# Altium PCB PCB_20140728.PcbDoc (part 1 of 4)
Units mil, origin at the board's own origin, x right, y up, seen from the top; angles counter-clockwise.
Board outline 7874.02 x 7086.61 mil, 2 copper layers (Top Layer, Bottom Layer); 393 components, 284 nets, 1417 pads, 403 vias.
Unrouted connection lines stored in the file: 1.
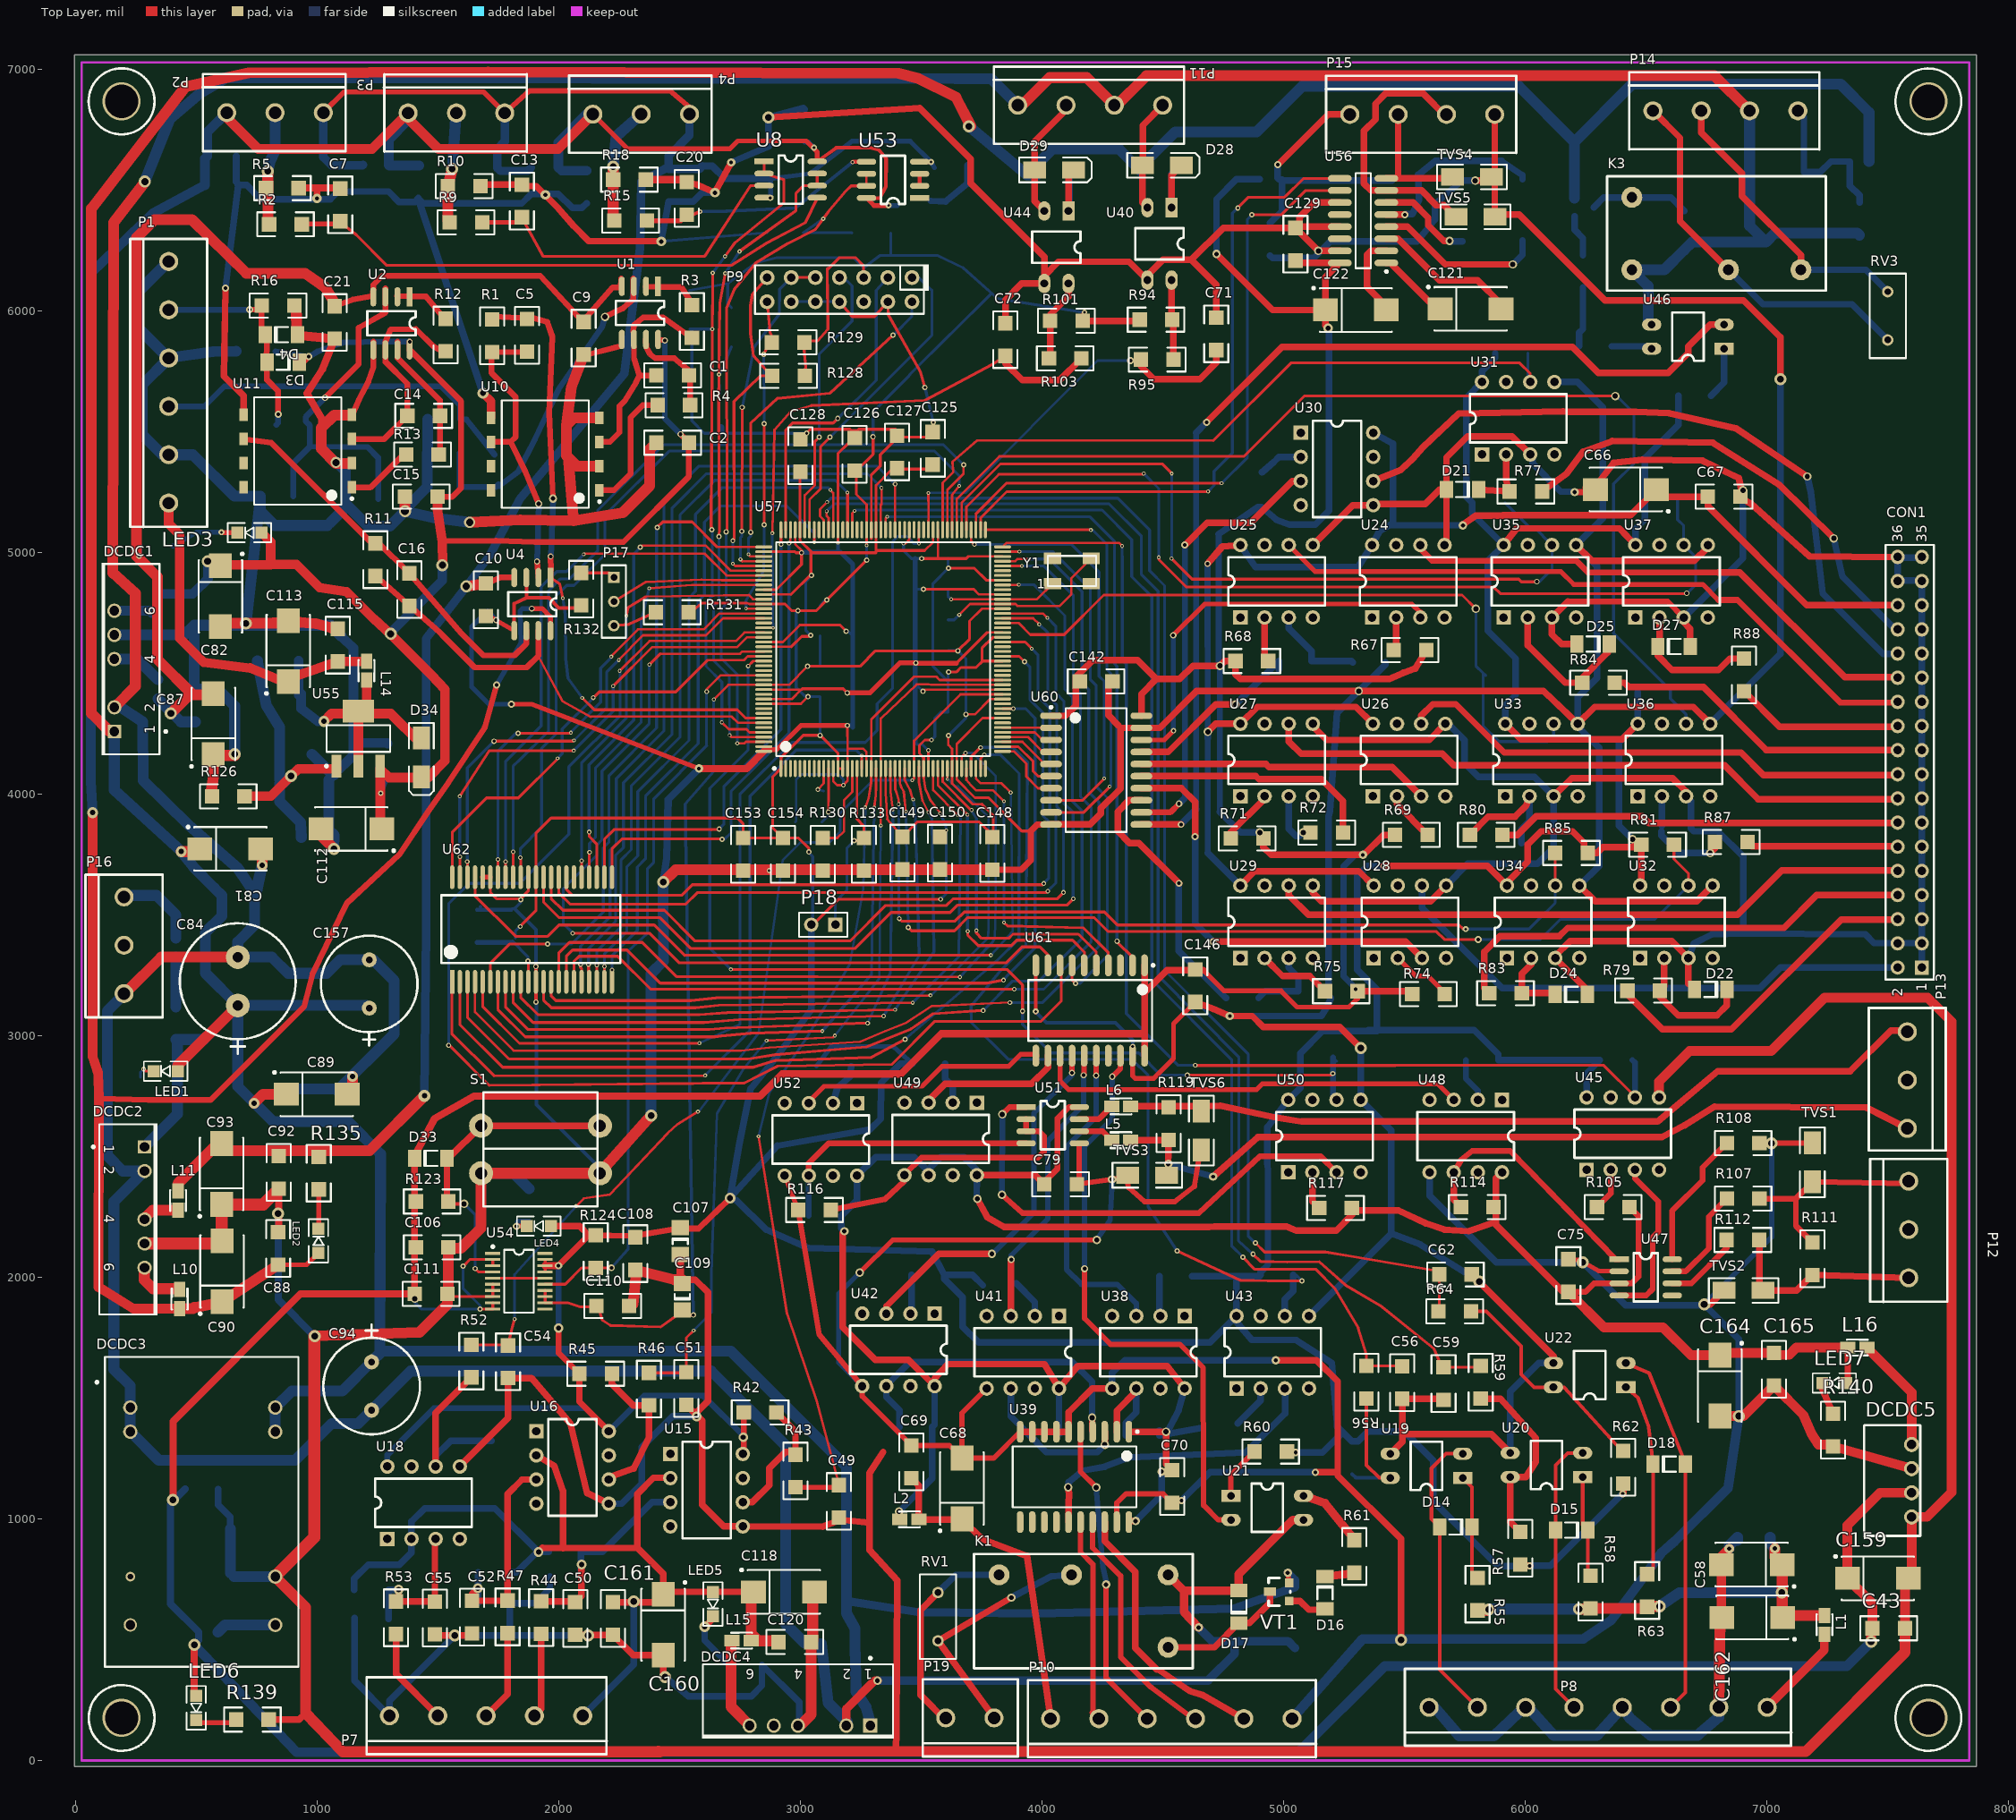
[diagram p0: Top Layer view]
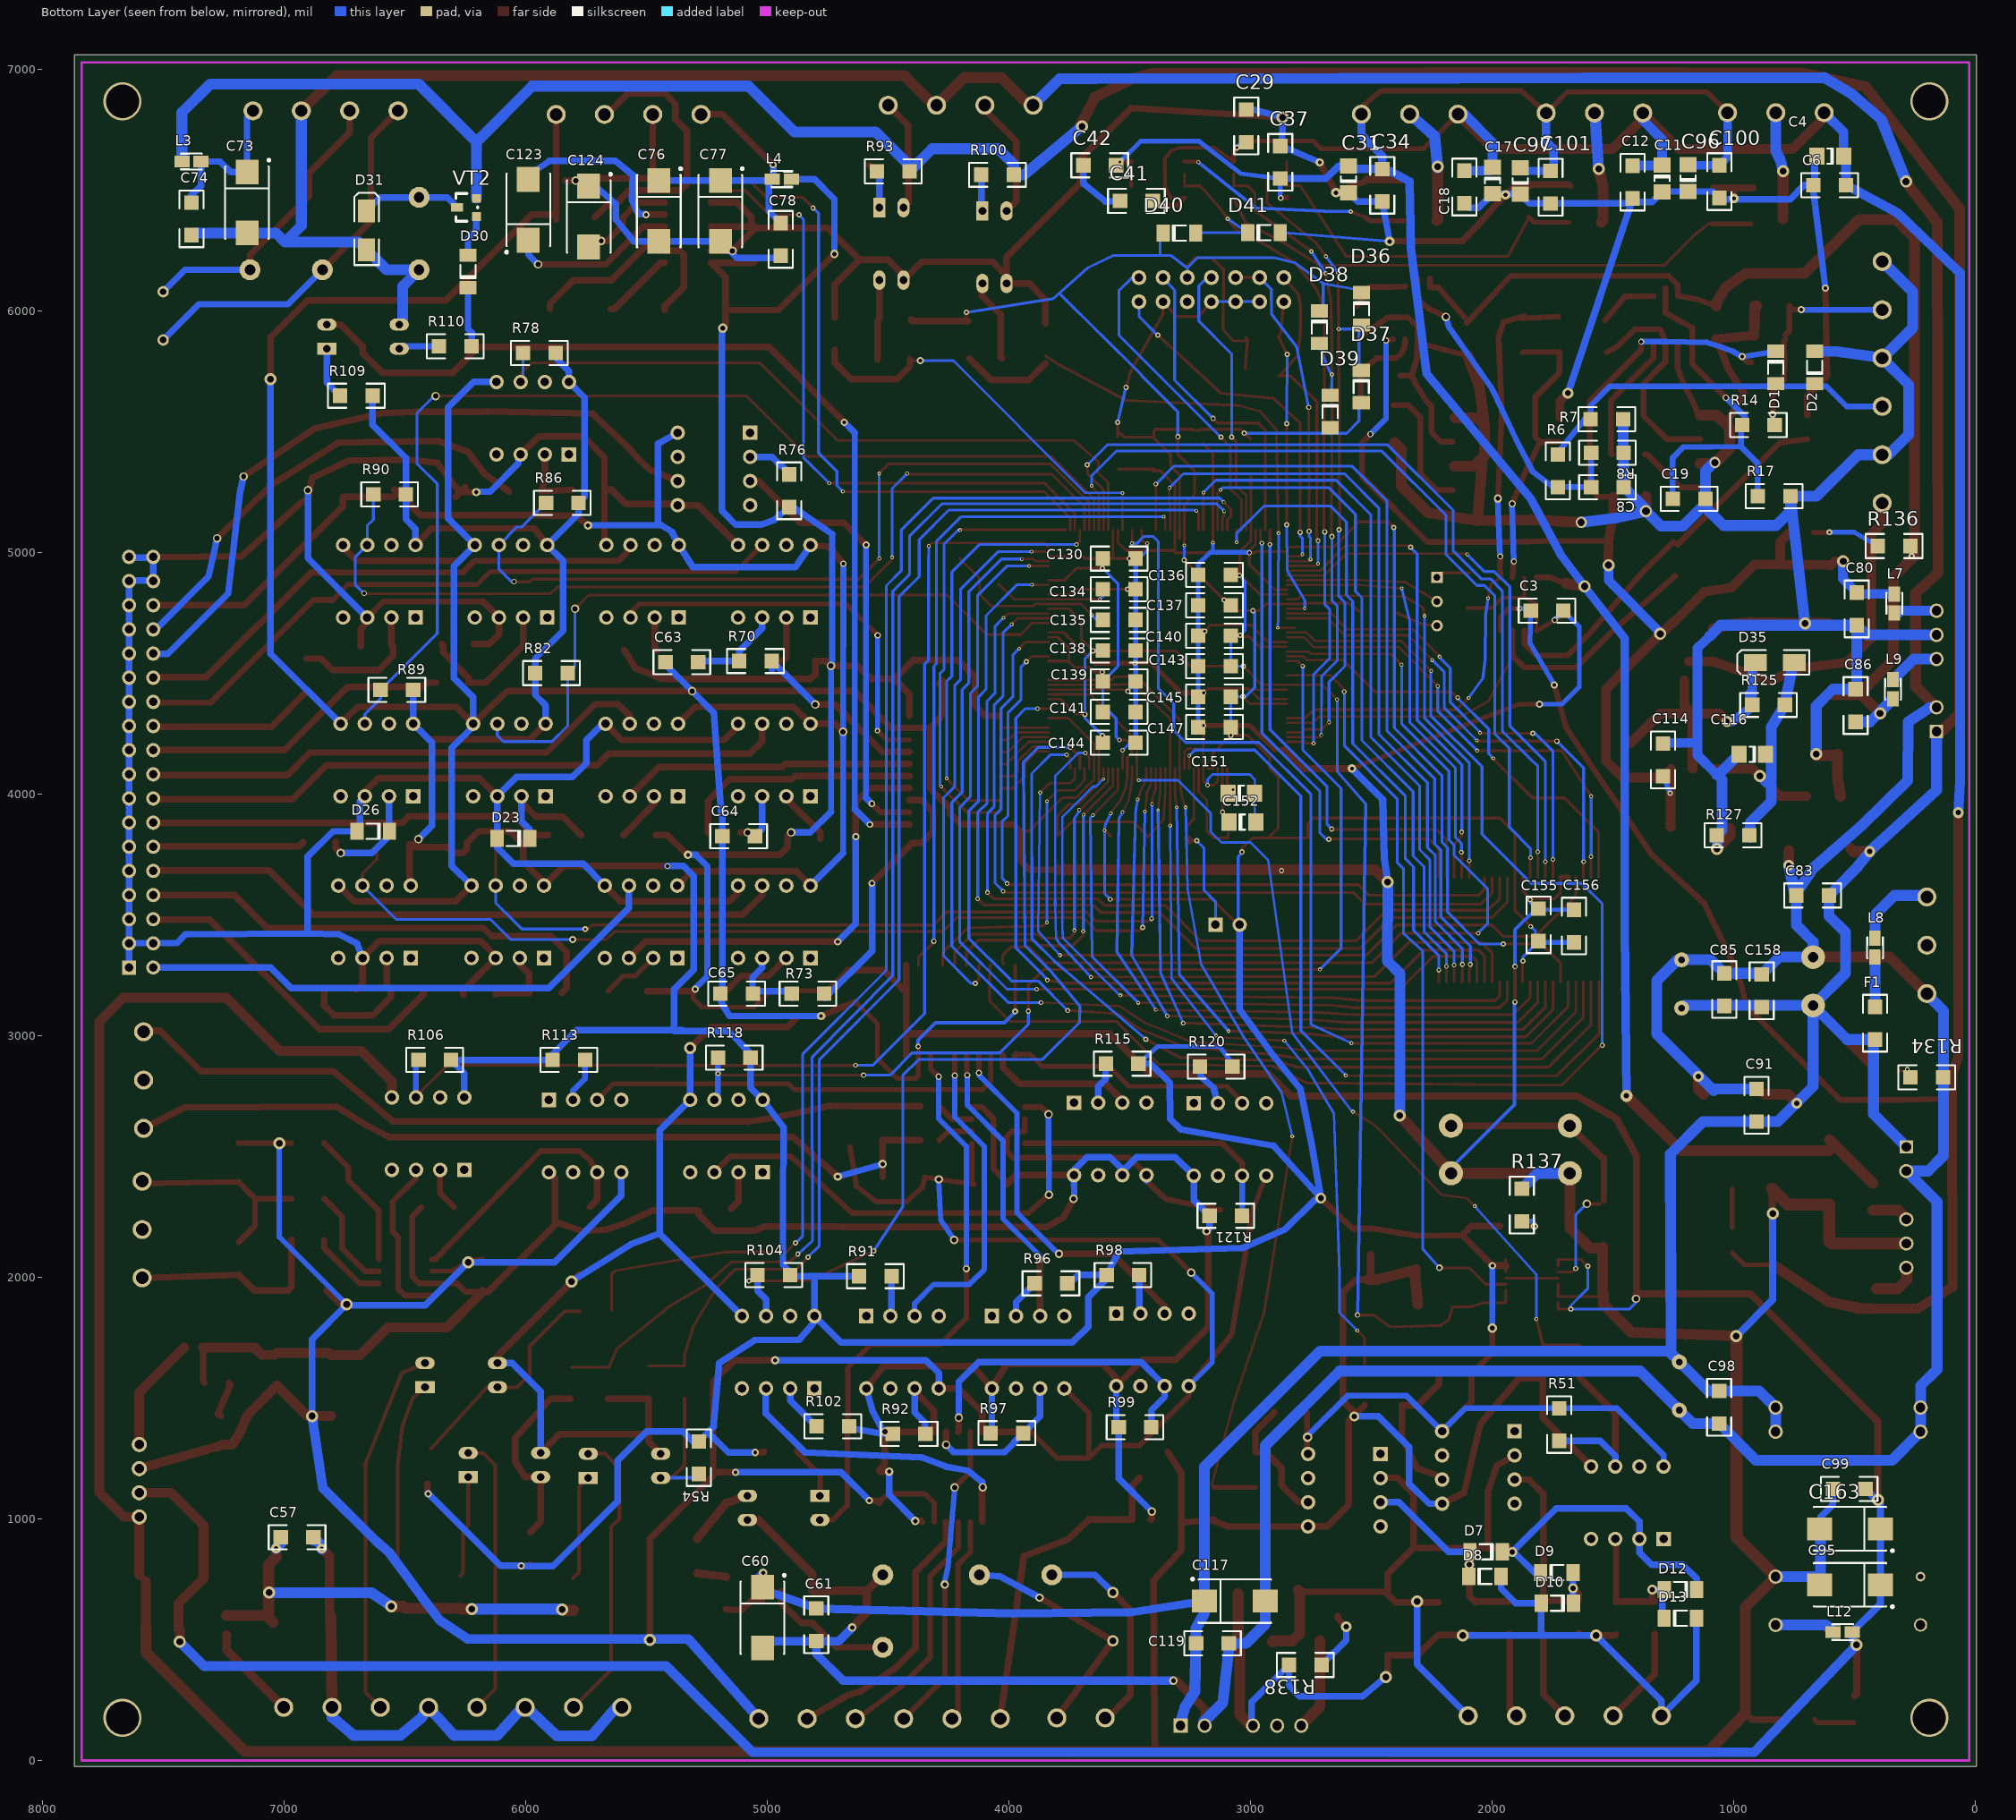
[diagram p1: Bottom Layer view, seen from below]

## Layer stack, top to bottom
Top Layer: signal copper 1.4
Dielectric: dielectric 12.6, FR-4, Dk 4.8
Bottom Layer: signal copper 1.4

## Board outline
-5,-25 7869.02,-25 7869.02,7061.61 -5,7061.61

## Design rules (kind name [scope] priority, off if disabled: settings)
Clearance [All] p1: gap=6
HoleSize [All] p1: absolutevalues=TRUE maxlimit=200 minlimit=1 maxpercent=80.000 minpercent=20.000
PolygonConnect [All] p1: connectstyle=Relief reliefconductorwidth=10 reliefentries=4 polygonreliefangle="90 Angle" airgapwidth=10
RoomDefinition POWER [InComponentClass('POWER')] p1: confinementstyle=ConfineIn formatcopy=TRUE lockcomponents=FALSE outline -2005,-3025 -5,-3025 -5,-2025 -2005,-2025
RoomDefinition PERIPHERAL [InComponentClass('PERIPHERAL')] p2: confinementstyle=ConfineIn formatcopy=TRUE lockcomponents=FALSE outline -2005,-3025 -5,-3025 -5,-2025 -2005,-2025
RoomDefinition dsp [InComponentClass('dsp')] p3: confinementstyle=ConfineIn formatcopy=TRUE lockcomponents=FALSE outline -2005,-3025 -5,-3025 -5,-2025 -2005,-2025
RoomDefinition DRIVE [InComponentClass('DRIVE')] p4: confinementstyle=ConfineIn formatcopy=TRUE lockcomponents=FALSE outline -2005,-3025 -5,-3025 -5,-2025 -2005,-2025
RoomDefinition DIDO [InComponentClass('DIDO')] p5: confinementstyle=ConfineIn formatcopy=TRUE lockcomponents=FALSE outline -2005,-3025 -5,-3025 -5,-2025 -2005,-2025
RoomDefinition AIAO [InComponentClass('AIAO')] p6: confinementstyle=ConfineIn formatcopy=TRUE lockcomponents=FALSE outline -2005,-3025 -5,-3025 -5,-2025 -2005,-2025
RoutingVias [All] p1: holewidth=15 width=22 viastyle="Through Hole" minholewidth=15 minwidth=22 maxholewidth=15 maxwidth=22
SilkToSilkClearance [All] p1 off: silktosilkclearance=10
SilkToSolderMaskClearance SilkscreenOverComponentPads [IsPad] p1: minsilkscreentomaskgap=10 clearancetoexposedcopper=TRUE
SolderMaskExpansion [All] p1: expansion=4
Width [All] p1: maxlimit=50 minlimit=10 preferedwidth=10 minimp=50.000000 maximp=50.000000 favimp=50.000000
25 further rules are at their usual default settings.

## Classes and differential pairs
component class AIAO: C1 C2 C3 C4 C5 C6 C7 C8 C9 C10 C11 C12 C13 C14 C15 C16 C17 C18 C19 C20 C21 C29 C31 C34 C37 C41 C42 C96 C97 C100 C101 D1 D2 D3 D4 D36 D37 D38 D39 D40 D41 P1 P2 P3 P4 R1 R2 R3 R4 R5 R6 R7 R8 R9 R10 R11 R12 R13 R14 R15 R16 R17 R18 U1 U2 U4 U8 U10 U11 U53
component class DIDO: C49 C50 C51 C52 C54 C55 C56 C57 C58 C59 C60 C61 C62 C160 C161 C162 D7 D8 D9 D10 D12 D13 D14 D15 D16 D17 D18 K1 L1 P7 P8 P19 R42 R43 R44 R45 R46 R47 R51 R52 R53 R54 R55 R56 R57 R58 R59 R60 R61 R62 R63 R64 RV1 U15 U16 U18 U19 U20 U21 U22 VT1
component class DRIVE: C63 C64 C65 C66 C67 CON1 D21 D22 D23 D24 D25 D26 D27 R67 R68 R69 R70 R71 R72 R73 R74 R75 R76 R77 R78 R79 R80 R81 R82 R83 R84 R85 R86 R87 R88 R89 R90 U24 U25 U26 U27 U28 U29 U30 U31 U32 U33 U34 U35 U36 U37
component class dsp: C121 C122 C123 C124 C125 C126 C127 C128 C129 C130 C134 C135 C136 C137 C138 C139 C140 C141 C142 C143 C144 C145 C146 C147 C148 C149 C150 C151 C152 C153 C154 C155 C156 P9 P11 P17 R128 R129 R130 R131 R132 R133 U56 u57 U60 U61 U62 Y1
component class PERIPHERAL: C68 C69 C70 C71 C72 C73 C74 C75 C76 C77 C78 C79 D28 D29 D30 D31 K3 L2 L3 L4 L5 L6 P10 P11 P12 P13 P14 P15 R91 R92 R93 R94 R95 R96 R97 R98 R99 R100 R101 R102 R103 R104 R105 R106 R107 R108 R109 R110 R111 R112 R113 R114 R115 R116 R117 R118 R119 R120 R121 RV3 TVS1 TVS2 TVS3 TVS4 TVS5 TVS6 U38 U39 U40 U41 U42 U43 U44 U45 U46 U47 U48 U49 U50 U51 U52 VT2
component class POWER: C43 C80 C81 C82 C83 C84 C85 C86 C87 C88 C89 C90 C91 C92 C93 C94 C95 C98 C99 C106 C107 C108 C109 C110 C111 C112 C113 C114 C115 C116 C117 C118 C119 C120 C157 C158 C159 C163 C164 C165 D33 D34 D35 DCDC1 DCDC2 DCDC3 DCDC4 DCDC5 F1 L7 L8 L9 L10 L11 L12 L14 L15 L16 LED1 LED2 LED3 LED4 LED5 LED6 LED7 P16 R123 R124 R125 R126 R127 R134 R135 R136 R137 R138 R139 R140 S1 U54 U55

## Components (designator, comment, footprint, x,y, rotation, side; value= is the part's Value field where it differs from the comment)
C1 "Cap" 1206#1 2404,5734 r0 top
C2 "Cap" 1206#1 2539,5456 r180 top
C3 "Cap" 1206#1 1840,4760 r180 bottom
C4 "Cap Pol1" 1206#2 600,6642 r0 bottom
C5 "Cap" 1206#1 1868,5833 r90 top
C6 "Cap" 1206#1 670,6522 r180 bottom
C7 "Cap" 1206#1 1095,6508 r270 top
C8 "Cap" 1206#1 1455,5272 r0 bottom
C9 "Cap" 1206#1 2103,5956 r270 top
C10 "Cap" 1206#1 1698,4873 r270 top
C11 "Cap Pol1" 1206#2 1296,6550 r270 bottom
C12 "Cap" 1206#1 1418,6467 r90 bottom
C13 "Cap" 1206#1 1847,6524 r270 top
C14 "Cap" 1206#1 1373,5567 r0 top
C15 "Cap" 1206#1 1498,5232 r180 top
C16 "Cap" 1206#1 1381,4915 r270 top
C17 "Cap Pol1" 1206#2 1998,6541 r270 bottom
C18 "Cap" 1206#1 2115,6447 r90 bottom
C19 "Cap" 1206#1 1117,5223 r0 bottom
C20 "Cap" 1206#1 2530,6535 r270 top
C21 "Cap" 1206#1 1072,6021 r270 top
C29 "Cap" 1206#1 3018,6835 r270 bottom
C31 "Cap Pol1" 1206#2 2594,6546 r90 bottom
C34 "Cap" 1206#1 2455,6589 r270 bottom
C37 "Cap" 1206#1 2877,6684 r270 bottom
C41 "Cap" 1206#1 3540,6457 r180 bottom
C42 "Cap" 1206#1 3692,6604 r180 bottom
C43 "Cap" 1206#1 7574,547 r180 top
C49 "Cap" 1206#1 3160,1005 r90 top
C50 "Cap" 1206#1 2068,520 r90 top
C51 "Cap" 1206#1 2528,1472 r90 top
C52 "Cap" 1206#1 1641,526 r90 top
C54 "Cap" 1206#1 1790,1583 r90 top
C55 "Cap" 1206#1 1487,522 r90 top
C56 "Cap" 1206#1 5492,1497 r90 top
C57 "Cap" 1206#1 6880,924 r0 bottom
C58 "Cap Pol1" 7343 6939,811 r180 top
C59 "Cap" 1206#1 5663,1493 r90 top
C60 "Cap Pol1" 7343 5021,591 r270 bottom
C61 "Cap" 1206#1 4798,494 r90 bottom
C62 "Cap" 1206#1 5780,2012 r180 top
C63 "Cap" 1206#1 5422,4547 r180 bottom
C64 "Cap" 1206#1 5187,3827 r180 bottom
C65 "Cap" 1206#1 5195,3175 r180 bottom
C66 "Cap Pol1" 7343 6418,5262 r180 top
C67 "Cap" 1206#1 6892,5232 r180 top
C68 "Cap Pol1" 7343 3669,1126 r90 top
C69 "Cap" 1206#1 3460,1304 r270 top
C70 "Cap" 1206#1 4539,1067 r90 top
C71 "Cap" 1206#1 4722,5974 r270 top
C72 "Cap" 1206#1 3849,5950 r270 top
C73 "Cap Pol1" 7343 7155,6450 r270 bottom
C74 "Cap" 1206#1 7385,6315 r90 bottom
C75 "Cap" 1206#1 6180,2075 r270 top
C76 "Cap Pol1" 7343 5450,6415 r270 bottom
C77 "Cap Pol1" 7343 5195,6415 r270 bottom
C78 "Cap" 1206#1 4945,6230 r90 bottom
C79 "Cap" 1206#1 4145,2385 r180 top
C80 "Cap" 1206#1 490,4700 r90 bottom
C81 "Cap Pol1" 7343 640,3774 r0 top
C82 "Cap Pol1" 7343 599,4820 r270 top
C83 "Cap" 1206#1 740,3581 r180 bottom
C84 "Cap Pol1" 电解电容1000uF 671,3126 r90 top
C85 "Cap" 1206#1 1039,3259 r270 bottom
C86 "Cap" 1206#1 495,4300 r90 bottom
C87 "Cap Pol1" 7343 570,4291 r90 top
C88 "Cap" 1206#1 838,2187 r270 top
C89 "Cap Pol1" 7343 998,2758 r0 top
C90 "Cap Pol1" 7343 606,2025 r90 top
C91 "Cap" 1206#1 905,2780 r270 bottom
C92 "Cap" 1206#1 841,2502 r270 top
C93 "Cap Pol1" 7343 604,2428 r90 top
C94 "Cap Pol1" 电解电容47uf 1225,1650 r90 top
C95 "Cap Pol1" 7343 518,727 r0 bottom
C96 "Cap Pol1" 1206#2 1189,6551 r90 bottom
C97 "Cap Pol1" 1206#2 1884,6539 r90 bottom
C98 "Cap" 1206#1 1060,1395 r90 bottom
C99 "Cap" 1206#1 589,1124 r180 bottom
C100 "Cap" 1206#1 1059,6604 r270 bottom
C101 "Cap" 1206#1 1758,6581 r270 bottom
C106 "Cap" 1206#1 1543,2124.26 r180 top
C107 "Cap Pol1" 1206#2 2503,2150 r270 top
C108 "Cap" 1206#1 2317,2031 r90 top
C109 "Cap Pol1" 1206#2 2511,1920 r90 top
C110 "Cap" 1206#1 2156,1882 r0 top
C111 "Cap" 1206#1 1404,1931.26 r0 top
C112 "Cap Pol1" 7343 1141,3857 r180 top
C113 "Cap Pol1" 7343 880,4593 r90 top
C114 "Cap" 1206#1 1292,4210 r270 bottom
C115 "Cap" 1206#1 1085,4685 r270 top
C116 "Cap Pol1" 1206#2 923,4166 r0 bottom
C117 "Cap Pol1" 7343 3065,660 r180 bottom
C118 "Cap Pol1" 7343 2932,698 r0 top
C119 "Cap" 1206#1 3090,485 r0 bottom
C120 "Cap" 1206#1 3045,490 r180 top
C121 "22uF" 7343 5775,6010 r0 top
C122 "22uF" 7343 5300,6005 r0 top
C123 "22uF" 7343 5990,6420 r90 bottom
C124 "22uF" 7343 5740,6392 r270 bottom
C125 "Cap" 1206#1 3548,5365 r90 top
C126 "Cap" 1206#1 3225,5340 r90 top
C127 "Cap" 1206#1 3400,5350 r90 top
C128 "Cap" 1206#1 3000,5335 r90 top
C129 "Cap" 1206#1 5050,6345 r270 top
C130 "Cap" 1206#1 3611,4976 r180 bottom
C134 "Cap" 1206#1 3611,4849 r180 bottom
C135 "Cap" 1206#1 3611,4722 r180 bottom
C136 "Cap" 1206#1 3082,4908 r0 bottom
C137 "Cap" 1206#1 3082,4782 r0 bottom
C138 "Cap" 1206#1 3611,4595 r180 bottom
C139 "Cap" 1206#1 3611,4468 r180 bottom
C140 "Cap" 1206#1 3082,4656 r0 bottom
C141 "Cap" 1206#1 3611,4341 r180 bottom
C142 "Cap" 1206#1 4292,4467 r180 top
C143 "Cap" 1206#1 3217,4530 r180 bottom
C144 "Cap" 1206#1 3611,4214 r180 bottom
C145 "Cap" 1206#1 3217,4404 r180 bottom
C146 "Cap" 1206#1 4635,3140 r90 top
C147 "Cap" 1206#1 3217,4278 r180 bottom
C148 "Cap" 1206#1 3795,3823 r270 top
C149 "Cap" 1206#1 3423,3824 r270 top
C150 "Cap" 1206#1 3578,3824 r270 top
C151 "Cap Pol1" 1206#2 3038,4005 r180 bottom
C152 "Cap Pol1" 1206#2 3034,3885 r180 bottom
C153 "Cap" 1206#1 2763,3684 r90 top
C154 "Cap" 1206#1 2928,3684 r90 top
C155 "Cap" 1206#1 1808,3527 r270 bottom
C156 "Cap" 1206#1 1661,3522 r270 bottom
C157 "Cap Pol1" 电解电容47uf 1215,3115 r270 top
C158 "Cap" 1206#1 884,3119 r90 bottom
C159 "Cap Pol1" 7343 7461,754 r0 top
C160 "Cap Pol1" 7343 2432,562 r270 top
C161 "Cap" 1206#1 2224,520 r90 top
C162 "Cap Pol1" 7343 6941,592 r180 top
C163 "Cap Pol1" 7343 518,959 r0 bottom
C164 "Cap Pol1" 7343 6807,1552 r270 top
C165 "Cap" 1206#1 7031,1552 r90 top
CON1 "Header 18X2" HDR2X18 7643.15,3282.76 r90 top
D1 "LL4148" SOD-80/MLL34 826,5767 r90 bottom
D2 "LL4148" SOD-80/MLL34 665,5767 r270 bottom
D3 "LL4148" SOD-80/MLL34 859,5789 r0 top
D4 "LL4148" SOD-80/MLL34 852,5903 r180 top
D7 "LL4148" SOD-80/MLL34 2025,864 r180 bottom
D8 "LL4148" SOD-80/MLL34 2030,762 r0 bottom
D9 "LL4148" SOD-80/MLL34 1732,778 r0 bottom
D10 "LL4148" SOD-80/MLL34 1730,651 r180 bottom
D12 "LL4148" SOD-80/MLL34 1220,707 r180 bottom
D13 "LL4148" SOD-80/MLL34 1221,589 r0 bottom
D14 "LL4148" SOD-80/MLL34 5714,966 r0 top
D15 "LL4148" SOD-80/MLL34 6194,953 r0 top
D16 "LL4148" SOD-80/MLL34 5172,694 r90 top
D17 "LL4148" SOD-80/MLL34 4815,636 r270 top
D18 "LL4148" SOD-80/MLL34 6597,1227 r180 top
D21 "Diode 1N4148" SOD-80/MLL34 5742,5262 r0 top
D22 "Diode 1N4148" SOD-80/MLL34 6769,3192 r0 top
D23 "Diode 1N4148" SOD-80/MLL34 6052,3817 r180 bottom
D24 "Diode 1N4148" SOD-80/MLL34 6192,3172 r180 top
D25 "Diode 1N4148" SOD-80/MLL34 6282,4622 r0 top
D26 "Diode 1N4148" SOD-80/MLL34 6632,3847 r180 bottom
D27 "Diode 1N4148" SOD-80/MLL34 6617,4612 r180 top
D28 "Diode 1N4007" SMA 4497,6604 r0 top
D29 "Diode 1N4007" SMA 4050,6585 r0 top
D30 "Diode 1N4148" SOD-80/MLL34 6240,6165 r270 bottom
D31 "Diode 1N4007" SMA 6660,6335 r90 bottom
D33 "Diode 1N4148" SOD-80/MLL34 1470,2493.26 r180 top
D34 "Diode 1N4007" SMA 1431,4152 r270 top
D35 "LL4148" SMA 830,4546 r0 bottom
D36 "LL4148" SOD-80/MLL34 2541,6010 r90 bottom
D37 "LL4148" SOD-80/MLL34 2542,5688 r90 bottom
D38 "LL4148" SOD-80/MLL34 2715,5934 r90 bottom
D39 "LL4148" SOD-80/MLL34 2671,5585 r90 bottom
D40 "LL4148" SOD-80/MLL34 3294,6324 r0 bottom
D41 "LL4148" SOD-80/MLL34 2944,6325 r0 bottom
DCDC1 "A2415S-1W" NPSIP7 160,4510 r90 top
DCDC2 "A2415S-1W" NPSIP7 285,2290 r270 top
DCDC3 "VRB2405ZP-6WR2" DIP24 526,1011 r270 top
DCDC4 "B2412S_2W" NPSIP7A_B2412s2 3040,144 r180 top
DCDC5 "B0505S_1W" B0505 7601,1008 r90 top
F1 "Fuse 1 1A" 1206#1 415,3120 r270 bottom
K1 "G6B-1114p-24v" SPST-NO 4625,855 r180 top
K3 "G6B-1114p-24v" SPST-NO 6340,6085 r0 top
L1 "BLM21PG221SN" 2012 7240,561 r90 top
L2 "BLM21PG221SN" 2012 3451,998 r0 top
L3 "BLM21PG221SN" 2012 7385,6620 r180 bottom
L4 "BLM21PG221SN" 2012 4941,6547 r0 bottom
L5 "BLM21PG221SN" 2012 4328,2568 r0 top
L6 "BLM21PG221SN" 2012 4328,2708 r0 top
L7 "BLM21PG221SN" 2012 335,4790 r90 bottom
L8 "BLM21PG221SN" 2012 415,3365 r270 bottom
L9 "BLM21PG221SN" 2012 340,4435 r270 bottom
L10 "BLM21PG221SN" 2012 430,1910 r270 top
L11 "BLM21PG221SN" 2012 424,2318 r90 top
L12 "BLM21PG221SN" 2012 549,531 r180 bottom
L14 "BLM21PG221SN" 2012 1204,4512 r90 top
L15 "BLM21PG221SN" 2012 2757,496 r0 top
L16 "BLM21PG221SN" 2012 7376,1709 r180 top
LED1 "LED" 0805D 395,2806 r180 top
LED2 "LED" 0805D 957,2128 r90 top
LED3 "LED" 0805D 742,5035 r180 top
LED4 "LED" 0805D 1940,2164 r180 top
LED5 "LED" 0805D 2686,671 r270 top
LED6 "LED" 0805D 547,241 r270 top
LED7 "LED" 0805D 7304,1515 r180 top
P1 "A_IN" phenox-6 385,5206 r90 top
P2 "SEN_C" PHENOX-3 625.18,6822.18 r0 top
P3 "SEN_B" PHENOX-3 1376,6821 r0 top
P4 "SEN_A" PHENOX-3 2141,6816 r0 top
P7 "POSITION" phenox-5 2099,185 r180 top
P8 "DI" phenox-8 7003,220 r180 top
P9 "JTAG" DIP14-2.54 3463,6040 r180 top
P10 "DISPLAY" phenox-6 5036,173 r180 top
P11 "TR" PHONEX-4 3900,6853 r0 top
P12 "CAN" PHENOX-3 7589,1998 r90 top
P13 "RS485" PHENOX-3 7583,3017 r270 top
P14 "CONTACT_COIL" PHONEX-4 6530,6830 r0 top
P15 "RS232" PHONEX-4 5275,6815 r0 top
P16 "Header 3" PHENOX-3 200,3175 r90 top
P17 "Header 3" HDR1X3 2228,4898 r270 top
P18 "Header 2" HDR1X2 3145,3460 r180 top
P19 "D_OUT" phenox-2 3802,176 r180 top
R1 "Res2" 1206#1 1724,5831 r90 top
R2 "Res2" 1206#1 801,6360 r0 top
R3 "Res2" 1206#1 2551,6025 r270 top
R4 "Res2" 1206#1 2544,5611 r180 top
R5 "Res2" 1206#1 923,6510 r180 top
R6 "Res2" 1206#1 1728,5407 r270 bottom
R7 "Res2" 1206#1 1457,5553 r0 bottom
R8 "Res2" 1206#1 1455,5414 r0 bottom
R9 "Res2" 1206#1 1548,6368 r0 top
R10 "Res2" 1206#1 1676,6518 r180 top
R11 "Res2" 1206#1 1241,5039 r270 top
R12 "Res2" 1206#1 1531,5969 r270 top
R13 "Res2" 1206#1 1503,5407 r180 top
R14 "Res2" 1206#1 830,5529 r0 bottom
R15 "Res2" 1206#1 2230,6375 r0 top
R16 "Res2" 1206#1 905,6023 r180 top
R17 "Res2" 1206#1 765,5234 r0 bottom
R18 "Res2" 1206#1 2360,6545 r180 top
R42 "Res2" 1206#1 2901,1441 r180 top
R43 "Res2" 1206#1 2980,1266 r270 top
R44 "Res2" 1206#1 1927,524 r90 top
R45 "Res2" 1206#1 2220,1601 r180 top
R46 "Res2" 1206#1 2373,1470 r90 top
R47 "Res2" 1206#1 1788,527 r90 top
R51 "Res2" 1206#1 1722,1323 r90 bottom
R52 "Res2" 1206#1 1638,1586 r90 top
R53 "Res2" 1206#1 1326,523 r90 top
R54 "Res2" 1206#1 5284,1186 r90 bottom
R55 "Res2" 1206#1 5804,621 r90 top
R56 "Res2" 1206#1 5344,1498 r90 top
R57 "Res2" 1206#1 5981,946 r270 top
R58 "Res2" 1206#1 6272,630 r90 top
R59 "Res2" 1206#1 5817,1498 r90 top
R60 "Res2" 1206#1 5015,1279 r180 top
R61 "Res2" 1206#1 5294,912 r270 top
R62 "Res2" 1206#1 6407,1281 r270 top
R63 "Res2" 1206#1 6506,636 r90 top
R64 "Res2" 1206#1 5777,1859 r180 top
R67 "Res2" 1206#1 5592,4597 r180 top
R68 "Res2" 1206#1 4802,4552 r0 top
R69 "Res2" 1206#1 5462,3832 r0 top
R70 "Res2" 1206#1 4982,4552 r0 bottom
R71 "Res2" 1206#1 4917,3817 r180 top
R72 "Res2" 1206#1 5247,3842 r180 top
R73 "Res2" 1206#1 4765,3175 r0 bottom
R74 "Res2" 1206#1 5533,3173 r0 top
R75 "Res2" 1206#1 5307,3185 r180 top
R76 "Res2" 1206#1 4910,5189 r90 bottom
R77 "Res2" 1206#1 5936,5254 r0 top
R78 "Res2" 1206#1 6012,5827 r180 bottom
R79 "Res2" 1206#1 6559,3187 r180 top
R80 "Res2" 1206#1 5772,3832 r0 top
R81 "Res2" 1206#1 6617,3792 r180 top
R82 "Res2" 1206#1 5827,4502 r0 bottom
R83 "Res2" 1206#1 5987,3177 r180 top
R84 "Res2" 1206#1 6237,4462 r0 top
R85 "Res2" 1206#1 6125.33,3757 r0 top
R86 "Res2" 1206#1 5917,5207 r180 bottom
R87 "Res2" 1206#1 6787,3802 r0 top
R88 "Res2" 1206#1 6907,4562 r270 top
R89 "Res2" 1206#1 6602,4432 r180 bottom
R90 "Res2" 1206#1 6632,5242 r180 bottom
R91 "Res2" 1206#1 4621,2005 r180 bottom
R92 "Res2" 1206#1 4346,1352 r0 bottom
R93 "Res2" 1206#1 4547,6579 r180 bottom
R94 "Res2" 1206#1 4540,5965 r180 top
R95 "Res2" 1206#1 4410,5800 r0 top
R96 "Res2" 1206#1 3759,1975 r0 bottom
R97 "Res2" 1206#1 3941,1355 r0 bottom
R98 "Res2" 1206#1 3596,2010 r180 bottom
R99 "Res2" 1206#1 3411,1380 r0 bottom
R100 "Res2" 1206#1 4115,6565 r180 bottom
R101 "Res2" 1206#1 4034,5960 r0 top
R102 "Res2" 1206#1 4662,1383 r0 bottom
R103 "Res2" 1206#1 4164,5805 r180 top
R104 "Res2" 1206#1 5041,2010 r180 bottom
R105 "Res2" 1206#1 6433,2291 r180 top
R106 "Res2" 1206#1 6445,2900 r180 bottom
R107 "Res2" 1206#1 6836,2326 r0 top
R108 "Res2" 1206#1 6836,2556 r0 top
R109 "Res2" 1206#1 6635,5650 r0 bottom
R110 "Res2" 1206#1 6360,5855 r180 bottom
R111 "Res2" 1206#1 7190,2010 r90 top
R112 "Res2" 1206#1 6835,2155 r0 top
R113 "Res2" 1206#1 5890,2900 r180 bottom
R114 "Res2" 1206#1 5735,2291 r0 top
R115 "Res2" 1206#1 3464,2885 r0 bottom
R116 "Res2" 1206#1 3126,2279 r180 top
R117 "Res2" 1206#1 5283,2287 r180 top
R118 "Res2" 1206#1 5205,2910 r180 bottom
R119 "Res2" 1206#1 4525,2704 r270 top
R120 "Res2" 1206#1 3075,2873 r0 bottom
R121 "Res2" 1206#1 3035,2255 r0 bottom
R123 "Res2" 1206#1 1543,2314.26 r180 top
R124 "Res2" 1206#1 2153,2039.26 r90 top
R125 "Res2" 1206#1 788,4370 r0 bottom
R126 "Res2" 1206#1 564,3992 r0 top
R127 "Res2" 1206#1 1070,3830 r180 bottom
R128 "Res2" 1206#1 3019,5733 r180 top
R129 "Res2" 1206#1 3017,5871 r180 top
R130 "Res2" 1206#1 3093,3684 r90 top
R131 "Res2" 1206#1 2402,4754 r0 top
R132 "Res2" 1206#1 2093,4782 r90 top
R133 "Res2" 1206#1 3263,3684 r90 top
R134 "Res2" 1206#1 133,2828 r0 bottom
R135 "Res2" 1206#1 1006,2499 r270 top
R136 "Res2" 1206#1 268,5028 r0 bottom
R137 "Res2" 1206#1 1877,2367 r270 bottom
R138 "Res2" 1206#1 2841,395 r180 bottom
R139 "Res2" 1206#1 799,169 r180 top
R140 "Res2" 1206#1 7276,1300 r90 top
RV1 "HEL-5D221K" RAD-0.2 3570,595 r270 top
RV3 "HEL-5D221K" RAD-0.2 7502,5981 r270 top
S1 "SW-PB" B3F4050 1757,2352.26 r90 top
TVS1 "SMAJ5.0CA" TVS-SMA 7191,2476 r90 top
TVS2 "SMAJ5.0CA" TVS-SMA 6905,1945 r0 top
TVS3 "SMAJ5.0CA" TVS-SMA 4436,2422 r0 top
TVS4 "SMAJ5.0CA" TVS-SMA 5780,6555 r0 top
TVS5 "SMAJ5.0CA" TVS-SMA 5795,6390 r0 top
TVS6 "SMAJ5.0CA" TVS-SMA 4659,2608 r270 top
U1 "TL032" SO-8 2411,6103 r270 top
U2 "TL032" SO-8 1382,6060 r270 top
U4 "TL032" SO-8 1965.36,4897.36 r270 top
U8 "TL032" SO-8 2850,6620 r0 top
U10 "HCNR201" SOP254P1230X400-8N-2 1944,5409 r180 top
U11 "HCNR201" SOP254P1230X400-8N-2 919,5421 r180 top
U15 "6N136" DIP-8N 2462,1269 r0 top
U16 "6N136" DIP-8N 1907,1363 r0 top
U18 "6N136" DIP-8N 1290,917 r90 top
U19 "TLP521-1" DIP4 5742,1170 r180 top
U20 "TLP521-1" DIP4 6239,1173 r180 top
U21 "TLP521-1" DIP4 4783,1096 r0 top
U22 "TLP521-1" DIP4 6418,1545 r180 top
U24 "6N136" DIP-8N 5367,4732 r90 top
U25 "6N136" DIP-8N 4822,4732 r90 top
U26 "6N136" DIP-8N 5370.33,3992 r90 top
U27 "6N136" DIP-8N 4822,3992 r90 top
U28 "6N136" DIP-8N 5373.67,3322 r90 top
U29 "6N136" DIP-8N 4822,3322 r90 top
U30 "6N136" DIP-8N 5072,5497 r0 top
U31 "6N136" DIP-8N 5822,5407 r90 top
U32 "6N136" DIP-8N 6477,3322 r90 top
U33 "6N136" DIP-8N 5918.67,3992 r90 top
U34 "6N136" DIP-8N 5925.33,3322 r90 top
U35 "6N136" DIP-8N 5912,4732 r90 top
U36 "6N136" DIP-8N 6467,3992 r90 top
U37 "6N136" DIP-8N 6457,4732 r90 top
U38 "6N136" DIP-8N 4591,1840 r270 top
U39 "SN74HCT245" SO20_M#1 4135,1174 r270 top
U40 "TLP521-1" DIP4 4537,6429 r270 top
U41 "6N136" DIP-8N 4071,1840 r270 top
U42 "6N136" DIP-8N 3556,1850 r270 top
U43 "6N136" DIP-8N 4806,1540 r90 top
U44 "TLP521-1" DIP4 4110,6415 r270 top
U45 "6N136" DIP-8N 6255,2445 r90 top
U46 "TLP521-1" DIP4 6825,5845 r180 top
U47 "SN65HVD251" SO-8 6390,2075 r0 top
U48 "6N136" DIP-8N 5905,2735 r270 top
U49 "6N136" DIP-8N 3731,2723 r270 top
U50 "6N136" DIP-8N 5020,2435 r90 top
U51 "SN65HVD3082E" SO-8 3935,2705 r0 top
U52 "6N136" DIP-8N 3235,2721 r270 top
U53 "TL032" SO-8 3494,6469 r180 top
U54 "TPS70151PWP" tssop20 1835,1984.26 r270 top
U55 "LM317MSTT3" SOT223-4N 1170,4231 r90 top
U56 "MAX232" SO16_M 5330,6375 r180 top
U57 "TMS320F2812" LQFP176_N 3343,4601 r90 top (schematic designator u57)
U60 "SN74HCT245" SO20_M#1 4225,4100 r0 top
U61 "SN74HCT245" SO20_M#2 4200,3105 r270 top
U62 "IS61LV25616" "TSOP44 - duplicate" 1541,3267 r90 top
VT1 "S9015" SOT23 4984,698 r90 top
VT2 "S9015" SOT23 6245,6430 r90 bottom
Y1 "XTAL" SMD5032 4024,4862 r0 top

## Footprints (in the part's own frame and the unit in brackets; to place one, negate y for a bottom-side part, rotate by r counter-clockwise, add the part's x,y. Pads: shape width x height; smd on the part's side, far side on the other; paste and mask are expansions set on the pad)
0805D [mil]
  rect 50x50 smd: A(-27,-48) K(73,-48)
  silkscreen extent -67,-88 113,-8
1206#1 [mil]
  rect 60x60 smd: 1(0,0) 2(135,0)
  silkscreen extent -50,-50 185,50
1206#2 [mil] "Chip Capacitor; Body 3.2 x 1.6 mm (LxW typ)"
  rect 62.99x70.87 smd: 1(-55.12,0) 2(55.12,0)
  silkscreen extent -12,-31 12,31
2012 [mm] "Capacitor, SM Tantalum; Body 2.0 x 1.25 mm (LxW typ)"
  rect 1.6x1.2 smd: 1(-1,0) 2(1,0)
  silkscreen extent -1.1,-0.85 1.1,0.85
7343 [mm] "Capacitor, SM Tantalum; Body 7.3 x 4.3 mm (LxW typ)"
  rect 2.6x2.4 smd: 1(-3.2,0) 2(3.2,0)
  silkscreen extent -4.58,-2.3 3.8,2.42
B3F4050 [mm]
  round 2.54 hole 1.27: 1(2,2) 1(2,-10.5) 2(7,-10.497) 2(7,2)
  silkscreen extent -1.47,-10.25 10.52,1.75
B0505 [mm]
  round 1.6 hole 1: 1(0,0) 2(2.54,0) 3(5.08,0) 4(7.62,0)
  silkscreen extent -2,-0.9 9.65,5
DIP4 [mil]
  rect 80x50 hole 32: 1(0,0)
  oval 80x50 hole 32: 2(0,-100) 3(300,-100) 4(300,0)
  silkscreen extent 85,-150 215,50
DIP14-2.54 [mil]
  round 62 hole 35: 1(1,-99.67) 2(1,0.33) 3(101,-99.67) 4(101,0.33) 5(201,-99.67) 6(201,0.33) 7(301,-99.67) 8(301,0.33) 9(401,-99.67) 10(401,0.33) 11(501,-99.67) 12(501,0.33) 13(601,-99.67) 14(601,0.33)
  silkscreen extent -69,-154 651,51
DIP24 [mm]
  round 1.5 hole 1: 2(-11.43,-7.62) 3(-8.89,-7.62) 14(11.43,7.62) 16(6.35,7.62) 22(-8.89,7.62) 23(-11.43,7.62)
  round 1 hole 0.6: 9(6.35,-7.62)
  round 1.4 hole 1: 11(11.43,-7.62)
  silkscreen extent -16.76,-11.25 15.82,10.06
DIP-8N [mil]
  rect 60x60 hole 35: 1(0,0)
  round 60 hole 35: 2(0,-100) 3(0,-200) 4(0,-300) 5(300,-300) 6(300,-200) 7(300,-100) 8(300,0)
  silkscreen extent 50,-350 250,50
HDR1X2 [mm] "Connector; Header; 2 Position"
  rect 1.5x1.5 hole 0.9: 1(0,0)
  round 1.5 hole 0.9: 2(2.54,0)
  silkscreen extent -1.27,-1.27 3.81,1.27
HDR1X3 [mm] "Connector; Header; 3 Position"
  rect 1.2x1.2 hole 0.7: 1(0,0)
  round 1.2 hole 0.7: 2(2.54,0) 3(5.08,0)
  silkscreen extent -1.27,-1.27 6.35,1.27
HDR2X18 [mm] "Connector; Header; 18x2 Position"
  rect 1.5x1.5 hole 0.9: 1(0,0)
  round 1.5 hole 0.9: 2(0,2.54) 3(2.54,0) 4(2.54,2.54) 5(5.08,0) 6(5.08,2.54) 7(7.62,0) 8(7.62,2.54) 9(10.16,0) 10(10.16,2.54) 11(12.7,0) 12(12.7,2.54) 13(15.24,0) 14(15.24,2.54) 15(17.78,0) 16(17.78,2.54) 17(20.32,0) 18(20.32,2.54) 19(22.86,0) 20(22.86,2.54) 21(25.4,0) 22(25.4,2.54) 23(27.94,0) 24(27.94,2.54) 25(30.48,0) 26(30.48,2.54) 27(33.02,0) 28(33.02,2.54) 29(35.56,0) 30(35.56,2.54) 31(38.1,0) 32(38.1,2.54) 33(40.64,0) 34(40.64,2.54) 35(43.18,0) 36(43.18,2.54)
  silkscreen extent -1.27,-1.27 44.45,3.81
LQFP176_N [mm] "Thin QFP, 176-Leads, Body 24x24mm, Pitch 0.5mm, IPC Medium Density"
  oval 1.8x0.3 smd: 1(-12.55,10.75) 2(-12.55,10.25) 3(-12.55,9.75) 4(-12.55,9.25) 5(-12.55,8.75) 6(-12.55,8.25) 7(-12.55,7.75) 8(-12.55,7.25) 9(-12.55,6.75) 10(-12.55,6.25) 11(-12.55,5.75) 12(-12.55,5.25) 13(-12.55,4.75) 14(-12.55,4.25) 15(-12.55,3.75) 16(-12.55,3.25) 17(-12.55,2.75) 18(-12.55,2.25) 19(-12.55,1.75) 20(-12.55,1.25) 21(-12.55,0.75) 22(-12.55,0.25) 23(-12.55,-0.25) 24(-12.55,-0.75) 25(-12.55,-1.25) 26(-12.55,-1.75) 27(-12.55,-2.25) 28(-12.55,-2.75) 29(-12.55,-3.25) 30(-12.55,-3.75) 31(-12.55,-4.25) 32(-12.55,-4.75) 33(-12.55,-5.25) 34(-12.55,-5.75) 35(-12.55,-6.25) 36(-12.55,-6.75) 37(-12.55,-7.25) 38(-12.55,-7.75) 39(-12.55,-8.25) 40(-12.55,-8.75) 41(-12.55,-9.25) 42(-12.55,-9.75) 43(-12.55,-10.25) 44(-12.55,-10.75) 89(12.55,-10.75) 90(12.55,-10.25) 91(12.55,-9.75) 92(12.55,-9.25) 93(12.55,-8.75) 94(12.55,-8.25) 95(12.55,-7.75) 96(12.55,-7.25) 97(12.55,-6.75) 98(12.55,-6.25) 99(12.55,-5.75) 100(12.55,-5.25) 101(12.55,-4.75) 102(12.55,-4.25) 103(12.55,-3.75) 104(12.55,-3.25) 105(12.55,-2.75) 106(12.55,-2.25) 107(12.55,-1.75) 108(12.55,-1.25) 109(12.55,-0.75) 110(12.55,-0.25) 111(12.55,0.25) 112(12.55,0.75) 113(12.55,1.25) 114(12.55,1.75) 115(12.55,2.25) 116(12.55,2.75) 117(12.55,3.25) 118(12.55,3.75) 119(12.55,4.25) 120(12.55,4.75) 121(12.55,5.25) 122(12.55,5.75) 123(12.55,6.25) 124(12.55,6.75) 125(12.55,7.25) 126(12.55,7.75) 127(12.55,8.25) 128(12.55,8.75) 129(12.55,9.25) 130(12.55,9.75) 131(12.55,10.25) 132(12.55,10.75)
  oval 0.3x1.8 smd: 45(-10.75,-12.55) 46(-10.25,-12.55) 47(-9.75,-12.55) 48(-9.25,-12.55) 49(-8.75,-12.55) 50(-8.25,-12.55) 51(-7.75,-12.55) 52(-7.25,-12.55) 53(-6.75,-12.55) 54(-6.25,-12.55) 55(-5.75,-12.55) 56(-5.25,-12.55) 57(-4.75,-12.55) 58(-4.25,-12.55) 59(-3.75,-12.55) 60(-3.25,-12.55) 61(-2.75,-12.55) 62(-2.25,-12.55) 63(-1.75,-12.55) 64(-1.25,-12.55) 65(-0.75,-12.55) 66(-0.25,-12.55) 67(0.25,-12.55) 68(0.75,-12.55) 69(1.25,-12.55) 70(1.75,-12.55) 71(2.25,-12.55) 72(2.75,-12.55) 73(3.25,-12.55) 74(3.75,-12.55) 75(4.25,-12.55) 76(4.75,-12.55) 77(5.25,-12.55) 78(5.75,-12.55) 79(6.25,-12.55) 80(6.75,-12.55) 81(7.25,-12.55) 82(7.75,-12.55) 83(8.25,-12.55) 84(8.75,-12.55) 85(9.25,-12.55) 86(9.75,-12.55) 87(10.25,-12.55) 88(10.75,-12.55) 133(10.75,12.55) 134(10.25,12.55) 135(9.75,12.55) 136(9.25,12.55) 137(8.75,12.55) 138(8.25,12.55) 139(7.75,12.55) 140(7.25,12.55) 141(6.75,12.55) 142(6.25,12.55) 143(5.75,12.55) 144(5.25,12.55) 145(4.75,12.55) 146(4.25,12.55) 147(3.75,12.55) 148(3.25,12.55) 149(2.75,12.55) 150(2.25,12.55) 151(1.75,12.55) 152(1.25,12.55) 153(0.75,12.55) 154(0.25,12.55) 155(-0.25,12.55) 156(-0.75,12.55) 157(-1.25,12.55) 158(-1.75,12.55) 159(-2.25,12.55) 160(-2.75,12.55) 161(-3.25,12.55) 162(-3.75,12.55) 163(-4.25,12.55) 164(-4.75,12.55) 165(-5.25,12.55) 166(-5.75,12.55) 167(-6.25,12.55) 168(-6.75,12.55) 169(-7.25,12.55) 170(-7.75,12.55) 171(-8.25,12.55) 172(-8.75,12.55) 173(-9.25,12.55) 174(-9.75,12.55) 175(-10.25,12.55) 176(-10.75,12.55)
  silkscreen extent -12.67,-11.25 11.25,11.57, body extent -12,-12 12,12, height 1.6
NPSIP7 [mm] "SIP; 7 Leads (2 Absent); Body 19.5 x 6 mm (LxW typ); Pitch 2.54 mm"
  rect 1.4x1.4 hole 1: 1(-6.35,0)
  round 1.5 hole 1: 2(-3.81,0) 4(1.27,0) 5(3.81,0) 6(6.35,0)
  silkscreen extent -8.83,-5.53 11.37,1.35
NPSIP7A_B2412s2 [mm] "SIP; 7 Leads (2 Absent); Body 19.5 x 7.6 mm (LxW typ); Pitch 2.54 mm"
  rect 1.5x1.5 hole 1: 1(-6.35,0)
  round 1.5 hole 1: 2(-3.81,0) 4(1.27,0) 5(3.81,0) 6(6.35,0)
  silkscreen extent -8.83,-7.22 11.37,1.35
phenox-2 [mm]
  round 2 hole 1.3: 1(0,0) 2(5.08,0)
  silkscreen extent -2.54,-4.06 7.5,4.06
PHENOX-3 [mm]
  round 2 hole 1.3: 1(0,0) 2(5.08,0) 3(10.16,0)
  silkscreen extent -2.54,-4.06 12.5,4.06
phenox-5 [mm]
  round 2 hole 1.3: 1(0,0) 2(5.08,0) 3(10.16,0) 4(15.24,0) 5(20.32,0)
  silkscreen extent -2.54,-4.06 22.73,4.06
phenox-6 [mm]
  round 2 hole 1.3: 1(0,0) 2(5.08,0) 3(10.16,0) 4(15.24,0) 5(20.32,0) 6(25.4,0)
  silkscreen extent -2.54,-4.06 27.79,4.06
phenox-8 [mm]
  round 2 hole 1.3: 1(0,0) 2(5.08,0) 3(10.16,0) 4(15.24,0) 5(20.32,0) 6(25.4,0) 7(30.48,0) 8(35.56,0)
  silkscreen extent -2.54,-4.06 38.1,4.06
PHONEX-4 [mm]
  round 2 hole 1.3: 1(0,0) 2(5.08,0) 3(10.16,0) 4(15.24,0)
  silkscreen extent -2.54,-4.06 17.5,4.06
RAD-0.2 [mm] "Radial Cap, Thru-Hole; 2 Leads; 0.2 in Pin Spacing"
  round 1.2 hole 0.7: 1(-2.54,0) 2(2.54,0)
  silkscreen extent -4.44,-1.91 4.44,1.91
SMA [mm] "DO-214-AC/SMA; 2 C-Bend Leads; Body 5 x 2.7 mm, inc. leads (LxW)"
  rect 2.4x1.8 smd: 1(-2.05,0) 2(2.05,0)
  silkscreen extent -3.65,-1.3 3.95,1.3
SMD5032 [mil]
  rect 70.87x47.24 smd: 1(20,10) 2(180,10) 3(180,115) 4(20,115)
  silkscreen extent 0,0 200,126
SO16_M [mm] "16-Pin Small Outline Integrated Circuit 1.27 mm Pitch, IPC Low Density"
  oval 2.5x0.7 smd: 1(-2.45,4.445) 2(-2.45,3.175) 3(-2.45,1.905) 4(-2.45,0.635) 5(-2.45,-0.635) 6(-2.45,-1.905) 7(-2.45,-3.175) 8(-2.45,-4.445) 9(2.45,-4.445) 10(2.45,-3.175) 11(2.45,-1.905) 12(2.45,-0.635) 13(2.45,0.635) 14(2.45,1.905) 15(2.45,3.175) 16(2.45,4.445)
  silkscreen extent -2.58,-5 0.8,5.47, body extent -2,-5 2,5, height 1.75
SO20_M#1 [mm] "20-Pin Small Outline Package (SO20), IPC Low Density"
  oval 2.3x0.7 smd: 1(-4.75,5.715) 2(-4.75,4.445) 3(-4.75,3.175) 4(-4.75,1.905) 5(-4.75,0.635) 6(-4.75,-0.635) 7(-4.75,-1.905) 8(-4.75,-3.175) 9(-4.75,-4.445) 10(-4.75,-5.715) 11(4.75,-5.715) 12(4.75,-4.445) 13(4.75,-3.175) 14(4.75,-1.905) 15(4.75,-0.635) 16(4.75,0.635) 17(4.75,1.905) 18(4.75,3.175) 19(4.75,4.445) 20(4.75,5.715)
  silkscreen extent -4.87,-6.5 3.2,6.74, body extent -3.8,-6.5 3.8,6.5, height 2.65
SO20_M#2 [mm] "20-Pin Small Outline Package (SO20), IPC Low Density"
  oval 2.3x0.7 smd: 1(-4.75,5.715) 2(-4.75,4.445) 3(-4.75,3.175) 4(-4.75,1.905) 5(-4.75,0.635) 6(-4.75,-0.635) 7(-4.75,-1.905) 8(-4.75,-3.175) 9(-4.75,-4.445) 10(-4.75,-5.715) 11(4.75,-5.715) 12(4.75,-4.445) 13(4.75,-3.175) 14(4.75,-1.905) 15(4.75,-0.635) 16(4.75,0.635) 17(4.75,1.905) 18(4.75,3.175) 20(4.75,5.715)
  oval 2.3x0.7 smd paste+0: 19(4.75,4.445)
  silkscreen extent -4.87,-6.5 3.2,6.74, body extent -3.8,-6.5 3.8,6.5, height 2.65
SO-8 [mil]
  rect 80x24 smd: 1(0,0)
  oval 80x24 smd: 2(0,-50) 3(0,-100) 4(0,-150) 5(220,-150) 6(220,-100) 7(220,-50) 8(220,0)
  silkscreen extent 60,-175 160,25
SOD-80/MLL34 [mm] "Metal Electrode Face (MELF) Diode; Body 3.5 x 1.7 mm (LxDia)"
  rect 1.4x1.8 smd: 1(-1.7,0) 2(1.7,0)
  silkscreen extent -0.7,-0.8 0.7,0.8
SOP254P1230X400-8N-2 [mm] "SOP, 8-Leads, Body 11.3x9.1mm (max), Pitch 2.54mm, IPC Medium Density"
  rect 0.9x1.3 smd: 1(-5.7,3.81) 2(-5.7,1.27) 3(-5.7,-1.27) 4(-5.7,-3.81) 5(5.7,-3.81) 6(5.7,-1.27) 7(5.7,1.27) 8(5.7,3.81)
  silkscreen extent -5.82,-5.65 4.57,5.65, body extent -4.57,-5.65 4.57,5.65, height 4
SOT23 [mil]
  rect 36x50 smd: 1(0.5,40)
  rect 36x36 smd: 2(-37.5,-40) 3(37.5,-40)
  silkscreen extent -58,-45 58,45
SOT223-4N [mm] "SOT223, 4-Leads, Body 6.5x3.5mm, Pitch 2.3mm, Lead Span 7mm, IPC Medium Density"
  rect 2.4x1 smd: 1(-2.9,2.3) 2(-2.9,0) 3(-2.9,-2.3)
  rect 2.4x3.3 smd: 4(2.9,0)
  silkscreen extent -3.02,-3.35 1.4,3.47, body extent -1.85,-3.35 1.85,3.35, height 1.7
SPST-NO [mm]
  round 2.2 hole 1.1: 1(2.6,2.2) 3(12.76,2.2) 4(20.38,2.2) 6(2.6,9.82)
  silkscreen extent 0,0 23.01,12.03
"TSOP44 - duplicate" [mm]
  rect 2.5x0.45 smd: 1(-1.1,-0.45)
  oval 2.5x0.45 smd: 2(-1.1,-1.25) 3(-1.1,-2.05) 4(-1.1,-2.85) 5(-1.1,-3.65) 6(-1.1,-4.45) 7(-1.1,-5.25) 8(-1.1,-6.05) 9(-1.1,-6.85) 10(-1.1,-7.65) 11(-1.1,-8.45) 12(-1.1,-9.25) 13(-1.1,-10.05) 14(-1.1,-10.85) 15(-1.1,-11.65) 16(-1.1,-12.45) 17(-1.1,-13.25) 18(-1.1,-14.05) 19(-1.1,-14.85) 20(-1.1,-15.65) 21(-1.1,-16.45) 22(-1.1,-17.25) 23(9.9,-17.25) 24(9.9,-16.45) 25(9.9,-15.65) 26(9.9,-14.85) 27(9.9,-14.05) 28(9.9,-13.25) 29(9.9,-12.45) 30(9.9,-11.65) 31(9.9,-10.85) 32(9.9,-10.05) 33(9.9,-9.25) 34(9.9,-8.45) 35(9.9,-7.65) 36(9.9,-6.85) 37(9.9,-6.05) 38(9.9,-5.25) 39(9.9,-4.45) 40(9.9,-3.65) 41(9.9,-2.85) 42(9.9,-2.05) 43(9.9,-1.25) 44(9.9,-0.45)
  silkscreen extent 0.89,-18.14 8,0.69
tssop20 [mm] "Shrink Small Outline; 20 Leads; Body Width 4.4 mm; Pitch 0.65 mm"
  rect 0.3x1.6 smd: 1(-2.925,-2.75) 2(-2.275,-2.75) 3(-1.625,-2.75) 4(-0.975,-2.75) 5(-0.325,-2.75) 6(0.325,-2.75) 7(0.975,-2.75) 8(1.625,-2.75) 9(2.275,-2.75) 10(2.925,-2.75) 11(2.925,2.75) 12(2.275,2.75) 13(1.625,2.75) 14(0.975,2.75) 15(0.325,2.75) 16(-0.325,2.75) 17(-0.975,2.75) 18(-1.625,2.75) 19(-2.275,2.75) 20(-2.925,2.75)
  silkscreen extent -3.75,-2.87 3.3,1.55
TVS-SMA [mm]
  rect 2.4x1.8 smd: 1(-2.05,0.025) 2(2.05,0.025)
  silkscreen extent -3.65,-1.28 3.68,1.33
电解电容47uf [mil] "5.04mm"
  round 62 hole 28: 1(0,0) 2(-200,0)
  silkscreen extent -300,-200 155,200
电解电容1000uF [mm]
  round 2.5 hole 1.1: 1(0,0) 2(5.08,0)
  silkscreen extent -5.08,-6.1 8.64,6.09

## Part data
C1 C2 C3 C5 C6 C7 C8 C9 C10 C12 C13 C14 C15 C16 C18 C19 C20 C21 C29 C34 C37 C41 C42 C43 C49 C50 C51 C52 C54 C55 C56 C57 C59 C61 C62 C63 C64 C65 C67 C69 C70 C71 C72 C74 C75 C78 C79 C80 C83 C85 C86 C88 C91 C92 C98 C99 C100 C101 C106 C108 C110 C111 C114 C115 C119 C120 C125 C126 C127 C128 C129 C130 C134 C135 C136 C137 C138 C139 C140 C141 C142 C143 C144 C145 C146 C147 C148 C149 C150 C153 C154 C155 C156 C158 C161 C165: "Capacitor"
C4 C11 C17 C31 C58 C60 C66 C68 C73 C76 C77 C81 C82 C84 C87 C89 C90 C93 C94 C95 C96 C97 C107 C109 C112 C113 C116 C117 C118 C151 C152 C157 C159 C160 C162 C163 C164: "Polarized Capacitor (Radial)"
C121 C122 C123 C124: library part "Cap Pol2", "Polarized Capacitor (Axial)"
CON1: "Header, 18-Pin, Dual row"
D1 D2 D3 D4 D7 D8 D9 D10 D12 D13 D16: library part "Diode 1N4148", "High Conductance Fast Diode"
D14 D15 D17 D18 D35 D36 D37 D38 D39 D40 D41: library part "Diode 1N4007", "1 Amp General Purpose Rectifier"
D21 D22 D23 D24 D25 D26 D27 D30 D33: "High Conductance Fast Diode"
D28 D29 D31 D34: "1 Amp General Purpose Rectifier"
DCDC3: library part WRB2405ZP-3WR2
DCDC5: library part newB0505
F1: library part "Fuse 1", "Fuse"
K1 K3: library part Relay-SPST, "Single-Pole Single-Throw Relay"
L1 L2 L4 L5 L6 L7 L8 L9 L10 L11 L12 L14 L15 L16: library part Inductor, "Inductor"
P1 P10: library part "Header 6", "Header, 6-Pin"
P2 P3 P4 P12 P13: library part "Header 3", "Header, 3-Pin"
P7: library part "Header 5", "Header, 5-Pin"
P8: library part "Header 8", "Header, 8-Pin"
P11 P14 P15: library part "Header 4", "Header, 4-Pin"
P16 P17: "Header, 3-Pin"
P18: "Header, 2-Pin"
P19: library part "Header 2", "Header, 2-Pin"
R1 R2 R3 R4 R5 R6 R7 R8 R9 R10 R11 R12 R13 R14 R15 R16 R17 R18 R42 R43 R44 R45 R46 R47 R51 R52 R53 R54 R55 R56 R57 R58 R59 R60 R61 R62 R63 R64 R67 R68 R69 R70 R71 R72 R73 R74 R75 R76 R77 R78 R79 R80 R81 R82 R83 R84 R85 R86 R87 R88 R89 R90 R91 R92 R93 R94 R95 R96 R97 R98 R99 R100 R101 R102 R103 R104 R105 R106 R107 R108 R109 R110 R111 R112 R113 R114 R115 R116 R117 R118 R119 R120 R121 R123 R124 R125 R126 R127 R128 R129 R130 R131 R132 R133 R134 R135 R136 R137 R138 R139 R140: "Resistor"
S1: "Switch"
U15 U16 U18 U24 U25 U26 U27 U28 U29 U30 U31 U32 U33 U34 U35 U36 U37 U38 U41 U42 U43 U45 U48 U49 U50 U52: "光耦"
U55: "Three-Terminal Adjustable Output Positive Voltage Regulator"
U56: "DUAL EIA-232 DRIVER/RECEIVER"
Y1: "Crystal Oscillator"

## Via types
v1: diameter 22, hole 12, Top Layer to Bottom Layer, 63 vias
v2: diameter 19, hole 11, Top Layer to Bottom Layer, 42 vias
v3: diameter 50, hole 28, Top Layer to Bottom Layer, 34 vias
v4: diameter 15, hole 8, Top Layer to Bottom Layer, 27 vias
v5: diameter 35, hole 22, Top Layer to Bottom Layer, 25 vias
v6: diameter 16, hole 8, Top Layer to Bottom Layer, 23 vias
v7: diameter 30, hole 15, Top Layer to Bottom Layer, 22 vias
v8: diameter 22, hole 11, Top Layer to Bottom Layer, 14 vias
v9: diameter 17, hole 8, Top Layer to Bottom Layer, 13 vias
v10: diameter 35, hole 20, Top Layer to Bottom Layer, 12 vias
v11: diameter 16, hole 7, Top Layer to Bottom Layer, 10 vias
v12: diameter 18, hole 8, Top Layer to Bottom Layer, 9 vias
v13: diameter 25, hole 15, Top Layer to Bottom Layer, 8 vias
v14: diameter 40, hole 22, Top Layer to Bottom Layer, 8 vias
v15: diameter 45, hole 22, Top Layer to Bottom Layer, 7 vias
v16: diameter 15, hole 7, Top Layer to Bottom Layer, 6 vias
v17: diameter 15, hole 9, Top Layer to Bottom Layer, 6 vias
v18: diameter 35, hole 18, Top Layer to Bottom Layer, tented bottom, 6 vias
v19: diameter 25, hole 12, Top Layer to Bottom Layer, 5 vias
v20: diameter 27, hole 15, Top Layer to Bottom Layer, 5 vias
v21: diameter 40, hole 18, Top Layer to Bottom Layer, 4 vias
v22: diameter 50, hole 30, Top Layer to Bottom Layer, 4 vias
v23: diameter 14, hole 7, Top Layer to Bottom Layer, 4 vias
v24: diameter 157.48, hole 137.8, Top Layer to Bottom Layer, 4 vias
v25: diameter 35, hole 15, Top Layer to Bottom Layer, 4 vias
v26: diameter 35, hole 18, Top Layer to Bottom Layer, 3 vias
v27: diameter 25, hole 11, Top Layer to Bottom Layer, 3 vias
v28: diameter 17, hole 9, Top Layer to Bottom Layer, 3 vias
v29: diameter 22, hole 15, Top Layer to Bottom Layer, 3 vias
v30: diameter 30, hole 17, Top Layer to Bottom Layer, 2 vias
v31: diameter 20, hole 12, Top Layer to Bottom Layer, 2 vias
v32: diameter 28, hole 15, Top Layer to Bottom Layer, 2 vias
v33: diameter 45, hole 25, Top Layer to Bottom Layer, 2 vias
v34: diameter 40, hole 18, Top Layer to Bottom Layer, tented bottom, 2 vias
v35: diameter 47, hole 30, Top Layer to Bottom Layer, 1 vias
v36: diameter 30, hole 18, Top Layer to Bottom Layer, 1 vias
v37: diameter 27, hole 17, Top Layer to Bottom Layer, 1 vias
v38: diameter 12, hole 7, Top Layer to Bottom Layer, 1 vias
v39: diameter 18, hole 10, Top Layer to Bottom Layer, 1 vias
v40: diameter 45, hole 30, Top Layer to Bottom Layer, 1 vias
v41: diameter 18, hole 11, Top Layer to Bottom Layer, 1 vias
v42: diameter 26, hole 15, Top Layer to Bottom Layer, 1 vias
v43: diameter 18, hole 9, Top Layer to Bottom Layer, 1 vias
v44: diameter 50, hole 32, Top Layer to Bottom Layer, 1 vias
v45: diameter 24, hole 15, Top Layer to Bottom Layer, 1 vias
v46: diameter 50, hole 22, Top Layer to Bottom Layer, 1 vias
v47: diameter 20, hole 10, Top Layer to Bottom Layer, 1 vias
v48: diameter 17, hole 7, Top Layer to Bottom Layer, 1 vias
v49: diameter 34, hole 15, Top Layer to Bottom Layer, 1 vias
v50: diameter 35, hole 17, Top Layer to Bottom Layer, 1 vias

## Nets (pads, with @x,y where several pads share a name; then routed paths per layer and width w, separated by ;. In a path a pad name is that pad's centre, name@x,y a point inside that pad or via, vN(x,y) a via of type N, cw(c..) or ccw(c..) an arc to the next point about the centre after c; other vN are vias at no path point)
1.8V: C109.1 C110.1 C125.1 C127.1 C128.1 C136.1 C138.1 C140.1 C143.2 C144.1 C148.1 C149.1 U54.12 U54.13 U54.14 U57.23 U57.37 U57.56 U57.75 U57.100 U57.112 U57.128 U57.143 U57.154 U57.162 | length 9000.6
  Top Layer w10: v28(2642,4393) 2702.36,4453.36 U57.162@2848.91,4453.36 2953.36,4453.36 v1(3030,4530) ; U57.154@2848.91,4610.84 2962.84,4610.84 ; U57.143@2848.91,4827.38 2961.43,4827.38 ; U57.128@2998.51,5095.09 C128.1@2998.51,5317 ; 3313.47,5000 U57.112@3313.47,5095.09 3313.47,5279.47 C127.1@3373,5339 ; U57.23@3352.84,4106.91 3352.84,4005.84 3360,3897 C149.1@3423,3824 ; 3515.5,5009.5 3549.69,5043.69 U57.100@3549.69,5095.09 ; v1(3613,4243) 3613,4204 3628.43,4188.57 U57.37@3628.43,4106.91 3628.43,4044.57 3714,3959 3752,3959 ; v1(3686,4331) 3723,4331 3786.31,4394.31 U57.56@3837.09,4394.31 ; 3701,4718 3751.32,4768.32 U57.75@3837.09,4768.32
  Top Layer w11.81: U54.14@1943.27,1945.87 U54.13@1943.27,1920.28 U54.12@1943.27,1894.69 2037.57,1894.69 2088,1878.26 2163,1878.26 2180,1823.26 2214,1801 2420.26,1794.26 2490,1844 v1(2557,1844) ; 2961.43,4827.38 3043.53,4909.47 3043.53,5000 3313.47,5000 ; 2962.84,4610.84 3006,4654 v1@3034,4654 ; U57.128@2998.51,5095.09 2998.51,5050.49 3043.53,5005.47 ; v1(3030,4530) 3247,4530 3311,4594 v1(3652,4594) 3701,4643 3701,4718 ; 3313.47,5005.47 3317.5,5009.5 3515.5,5009.5 ; C127.1@3373,5339 C127.1@3403,5339 ; C127.1@3396.61,5346.39 C125.1@3546.61,5346.39 ; C149.1@3423,3824 3485,3886 3741,3886 C148.1@3798,3829 ; 3752,3959 3799,3912 C148.1@3799,3829
  Bottom Layer w11.81: v1(2557,1844) 2523,3960 2641,4095 v28@2641,4392 ; v1(3030,4530) C143.2@3082,4530 C140.1@3082,4656 ; v1(3043,4658) 3023,4678 3023,4882 3046,4905 v1(3046,4907) ; C144.1@3611,4241 v1(3613,4243) 3686,4316 v1(3686,4331) 3686,4560 v1(3652,4594) ; C138.1@3611,4595 v1@3660,4595
3.3V: C107.1 C108.2 C126.1 C130.1 C137.1 C139.1 C141.1 C145.2 C147.2 C150.1 C153.2 C154.2 C155.2 C156.2 D36.2 D38.2 D40.2 LED4.A P9.5 P18.2 R42.2 R45.2 R51.2 R54.2 R57.2 R60.1 R62.2 R78.2 R81.2 R82.2 R85.2 R86.2 R89.2 R90.2 R91.1 R94.2 R96.1 R98.1 R101.2 R104.2 R106.2 R109.1 R113.1 R115.1 R118.2 R120.1 R124.2 R128.1 R129.1 R131.2 U15.8 U16.8 U18.8 U31.8 U32.8 U33.8 U34.8 U35.8 U36.8 U37.8 U43.8 U45.8 U50.8 U54.17 U54.18 U54.19 U57.1 U57.13 U57.14 U57.31 U57.64 U57.69 U57.81 U57.114 U57.145 U57.166 U62.11 U62.33 | length 33824.7
  Top Layer w10: 2595,4792 2777,4792 2789.99,4788.01 U57.145@2848.91,4788.01 2936.99,4788.01 ; U57.166@2848.91,4374.62 3002.62,4374.62 v1(3032,4404) ; 3232,5242 3274.1,5199.9 U57.114@3274.1,5095.09 ; 3510.32,4069 3518,4021 3525,4007 3537,3979 v4@3578,3924 ; 3510.32,4151.68 3493,4169 3493,4202 3516,4225 v2(3543,4225) ; 3769.57,4886.43 U57.81@3837.09,4886.43 ; 3797.21,4650.21 U57.69@3837.09,4650.21
  Top Layer w11: 2886,4073.13 U57.1@2919.77,4106.91 2919.77,4151.77 ; U57.13@3155.99,4106.91 3155.99,4170.01
  Top Layer w11.81: v2(1840,3453) 1905.17,3518.17 U62.33@1905.17,3656.76 1905.17,3839.17 1967.98,3901.98 2739.98,3901.98 2763,3878.97 C153.2@2763,3819 ; v1(1872,3310) 1873.68,3308.32 U62.11@1873.68,3223.69 ; U54.17@1943.27,2022.65 U54.18@1943.27,2048.24 ; U54.18@1943.27,2049 U54.19@1943.27,2073.83 ; R131.2@2540,4750 2595,4792 ; C153.2@2753,3830 2753,3829 C153.2@2763,3819 ; 2886,4073.13 2886,3863 2885,3862 C154.2@2928,3819 ; 2919.77,4151.77 3012,4244 v1(3082,4244) 3155.99,4170.01 ; 2936.99,4788.01 2965,4760 3065,4760 v1(3110,4805) v1(3275,4970) ; R129.1@3018,5892 R129.1@3012,5877 ; R128.1@3019,5762 3022,5765 R129.1@3012,5877 ; v1(3035,3761) 3035,3775 3036,3776 2993,3819 C154.2@2928,3819 ; P18.2@3050,3445 3050,3457 3159,3566 v2(3581,3566) ; 3112,6176 3114,5925 3071,5877 R129.1@3012,5877 ; 3114,6174 3162,6222 3228,6222 3262,6188 P9.5@3262,6139.67 ; U57.13@3155.99,4106.91 U57.14@3175.68,4106.91 ; 3232,5242 3232,5339 3301,5408 v1(3301,5480) ; v16(3274.1,5031.1) U57.114@3274.1,5095.09 ; 3510.32,4069 U57.31@3510.32,4106.91 3510.32,4151.68 ; C150.1@3578,3825 v4(3604,3851) ; v1(3613,4936) 3720,4936 3769.57,4886.43 ; v1@3615,4507 3647,4507 3665,4525 3728,4525 3754.79,4551.79 U57.64@3837.09,4551.79 ; 3752,4554.57 3752,4605 3797.21,4650.21 ; R101.2@4169,5960 4180,5971 4174,5995 v8@4170,5991 ; C153.2@2763,3819 C154.2@2928,3819
  Top Layer w25: v7@1998.74,2049 2124,2174.26 2311,2172 2315.87,2172.81 C107.1@2499,2203.26 ; v14(1999,1790) 1999,1687 R45.2@2085,1601 2085,1485 U16.8@2207,1363 ; C107.1@2504,2202 2579,2202 v33(2709,2328) ; U15.8@2762,1269 2766,1273 R42.2@2766,1441
  Top Layer w27: LED4.A@1967,2212 2086.26,2212 R124.2@2124,2174.26
  Top Layer w27.56: R101.2@4169,5960 4400,5960 R94.2@4405,5965 ; R60.1@5015,1279 5019,1275 v7(5051,1275) ; v29(5414,3703) 5844.33,3703 U34.8@5925.33,3622 5925.33,3635.33 6012,3722 6012,3792 6067,3847 6196,3847 6244,3799 6244,3773.33 R85.2@6260.33,3757 ; U35.8@5912,5032 5966,5101 6391,5101 U37.8@6457,5032 ; U33.8@5918.67,4292 5983.67,4227 6402,4227 U36.8@6467,4292 ; R57.2@5981,811 5986,806 v7(6020,806) ; R85.2@6272,3757 6299,3757 6323,3781 R81.2@6471,3781 ; v7(6405,1104) 6407,1106 R62.2@6407,1146 ; v5(6445,3814) 6467,3792 R81.2@6482,3792 6482,3627 U32.8@6477,3622
  Top Layer w30: U54.18@1943.27,2049 v7@1998.74,2049
  Bottom Layer w11.81: C155.2@1803,3387 C155.2@1808,3392 1872,3328 v1(1872,3310) ; C155.2@1820,3404 1820,3433 v2(1840,3453) ; D36.2@2541,6086 2699,6114 ; D38.2@2715,6014.71 2699,6030.71 2699,6114 ; v1@2998,4760 v1(2990,4760) 2983,4753 2983,4442 3021,4404 v1(3032,4404) C145.2@3082,4404 C147.2@3082,4278 v1(3082,4244) ; v1@3033.5,3759.5 3051,3742 3051,3446 P18.2@3050,3445 ; C137.1@3082,4782 3105,4805 v1(3110,4805) ; P9.5@3262,6139.67 3262,6179 ; v16(3274.1,5031.1) 3274.1,4973 3273,4971.9 v1(3275,4970) ; v1(3301,5480) 3301,5584 3449,5732 3454,5739 3792.42,6074 ; D40.2@3374.71,6324 3374.71,6232.29 3376,6231 ; v2(3543,4225) 3557,4239 3557,4315 3583,4341 C141.1@3611,4341 C139.1@3611,4468 ; v4(3579,3921.5) 3602,3872 v4(3604,3851) 3604,3589 v2(3581,3566) ; C130.1@3611,4976 3611,4938 v1(3613,4936) 3549,4872 3549,4530 C139.1@3611,4468 ; C139.1@3612,4467 C139.1@3611,4468 ; C139.1@3614,4471 C139.1@3611,4468 ; v1(3614,4506) 3611,4503 C139.1@3611,4468 ; v8(4176,5995) 3817,6052 3674,6180 3568,6231 3376,6231 ; 2699,6114 2813,6199 2901,6222 3219,6222 3262,6179 ; 3262,6179 3330,6231 3376,6231
  Bottom Layer w20: C156.2@1661,3387 C155.2@1803,3387 ; R120.1@3067,2875 3068.95,2877.58 3129,2957 3384.39,2955.61 R115.1@3464,2885
  Bottom Layer w25: U18.8@1290,1217 1290,1265 1483,1458 R51.2@1722,1458 2112,1458 U16.8@2207,1363 2354,1510 2598,1510 v14@2764,1344 ; v14@1999,1792 v7(1999,2048)
  Bottom Layer w27.56: P18.2@3050,3445 P18.2@3045,3460 3045,3107.95 2900,2911 2794,2781 2748,2552 v33(2709,2328) ; R115.1@3464,2885 3414,2885 3335,2806 3333,2656 3289,2612 2905,2545 v33(2709,2328) ; R96.1@3756,1967 3713,2010 R98.1@3596,2010 ; R91.1@4621,2005 4805,2005 ; R104.2@4900,2006 R104.2@4901,2005 ; v7(5051,1275) 5162,1275 5246,1359 ; 5351,3023 5790,3023 5890,2923 R113.1@5890,2900 R106.2@6310,2900 6255,2845 U45.8@6255,2745 ; v29(5414,3703) 5348,3703 5306,3661 5306,3273 5387,3192 5387,3020 5162,3020 5070,2928 R118.2@5070,2910 5070,2785 U50.8@5020,2735 4934,2622 4934,2469.25 4936,2438.25 4936,2052 4906,2022 R104.2@4906,2010 R104.2@4901,2005 ; R78.2@5877,5827 5877,5807 5822,5752 U31.8@5822,5707 5757,5642 5757,5232 R86.2@5782,5207 5782,5162 U35.8@5912,5032 5847,4967 5847,4677 5962,4562 R82.2@5962,4502 5962,4412 5918.67,4368.67 U33.8@5918.67,4292 ; v7(6020,806) 6106,806 v7@6406,1106 ; v7@6021,805 5888,805 5620,1073 5620,1242 5500,1362 5350,1362 5309,1321 R54.2@5284,1321 5246,1359 ; v5(6445,3814) 6389,3870 6389,4214 U36.8@6467,4292 ; U37.8@6457,5032 6457,5098 6497,5138 R90.2@6497,5242 6497,5392 6635,5530 R109.1@6635,5650 ; 6467,4342 U36.8@6467,4292 ; 6467,4357 6467,4422 U36.8@6467,4292 ; v33(2709,2328) 2734,2319 2858,2198 3035,2121 3545,2107 R98.1@3596,2010 ; R98.1@3596,2010 3596,1994 3672,1918 3672,1796 3738,1730 4696,1730 U43.8@4806,1840 ; 4805,2005 R104.2@4901,2005 ; 4805,2005 4806,2004 U43.8@4806,1840 ; U43.8@4806,1840 4806,1815 4869,1741 5053,1740 5200,1646 5222,1399 5222,1383 5246,1359
  other v14: 2764,1338
5V_DRIVE: C66.1 C67.2 CON1.32 U24.8 U25.8 U26.8 U27.8 U28.8 U29.8 U30.8 | length 6542.4
  Top Layer w27.56: v20(4686,4955) 4747,5026 U25.8@4822,5032 ; v5(4687,4259) 4720,4292 U27.8@4822,4292 4892,4362 5300.33,4362 U26.8@5370.33,4292 ; U29.8@4822,3622 4882,3682 5312,3682 5372,3622 U28.8@5373.67,3622 ; v18@5744,5118 5797,5154 5907,5154 5909,5156 6437.98,5156 C66.1@6530.98,5249 ; C66.1@6527.98,5252 C66.1@6530.98,5249 ; C66.1@6543.98,5262 C66.1@6530.98,5249 ; CON1.32@7543.15,4782.76 7166.24,4782.76 6757,5192 C67.2@6757,5232 6547.98,5232 C66.1@6530.98,5249
  Bottom Layer w25: v20(4686,4955) v5(4687,4259) 4687,3757
  Bottom Layer w27.56: 4687,3757 U29.8@4822,3622 ; 4687,4232 v5(4687,4259) ; U25.8@4822,5032 4884,4941 5309,4941 U24.8@5367,5032 5397,5088 5453,5122 ; U30.8@5372,5497 5453,5452 5453,5122 ; v18(5743,5113) 5440,5115 5453,5122